# Altium PCB Wenzel_REF.PCBDOC (part 7 of 7)
Units mm, origin at the board's own origin, x right, y up, seen from the top; angles counter-clockwise.
Board outline 222.63 x 100.1 mm, 4 copper layers (Top, L2, L3, Bot), stack 1.6 mm thick; 406 components, 236 nets, 1324 pads, 1362 vias.
Unrouted connection lines stored in the file: 1.
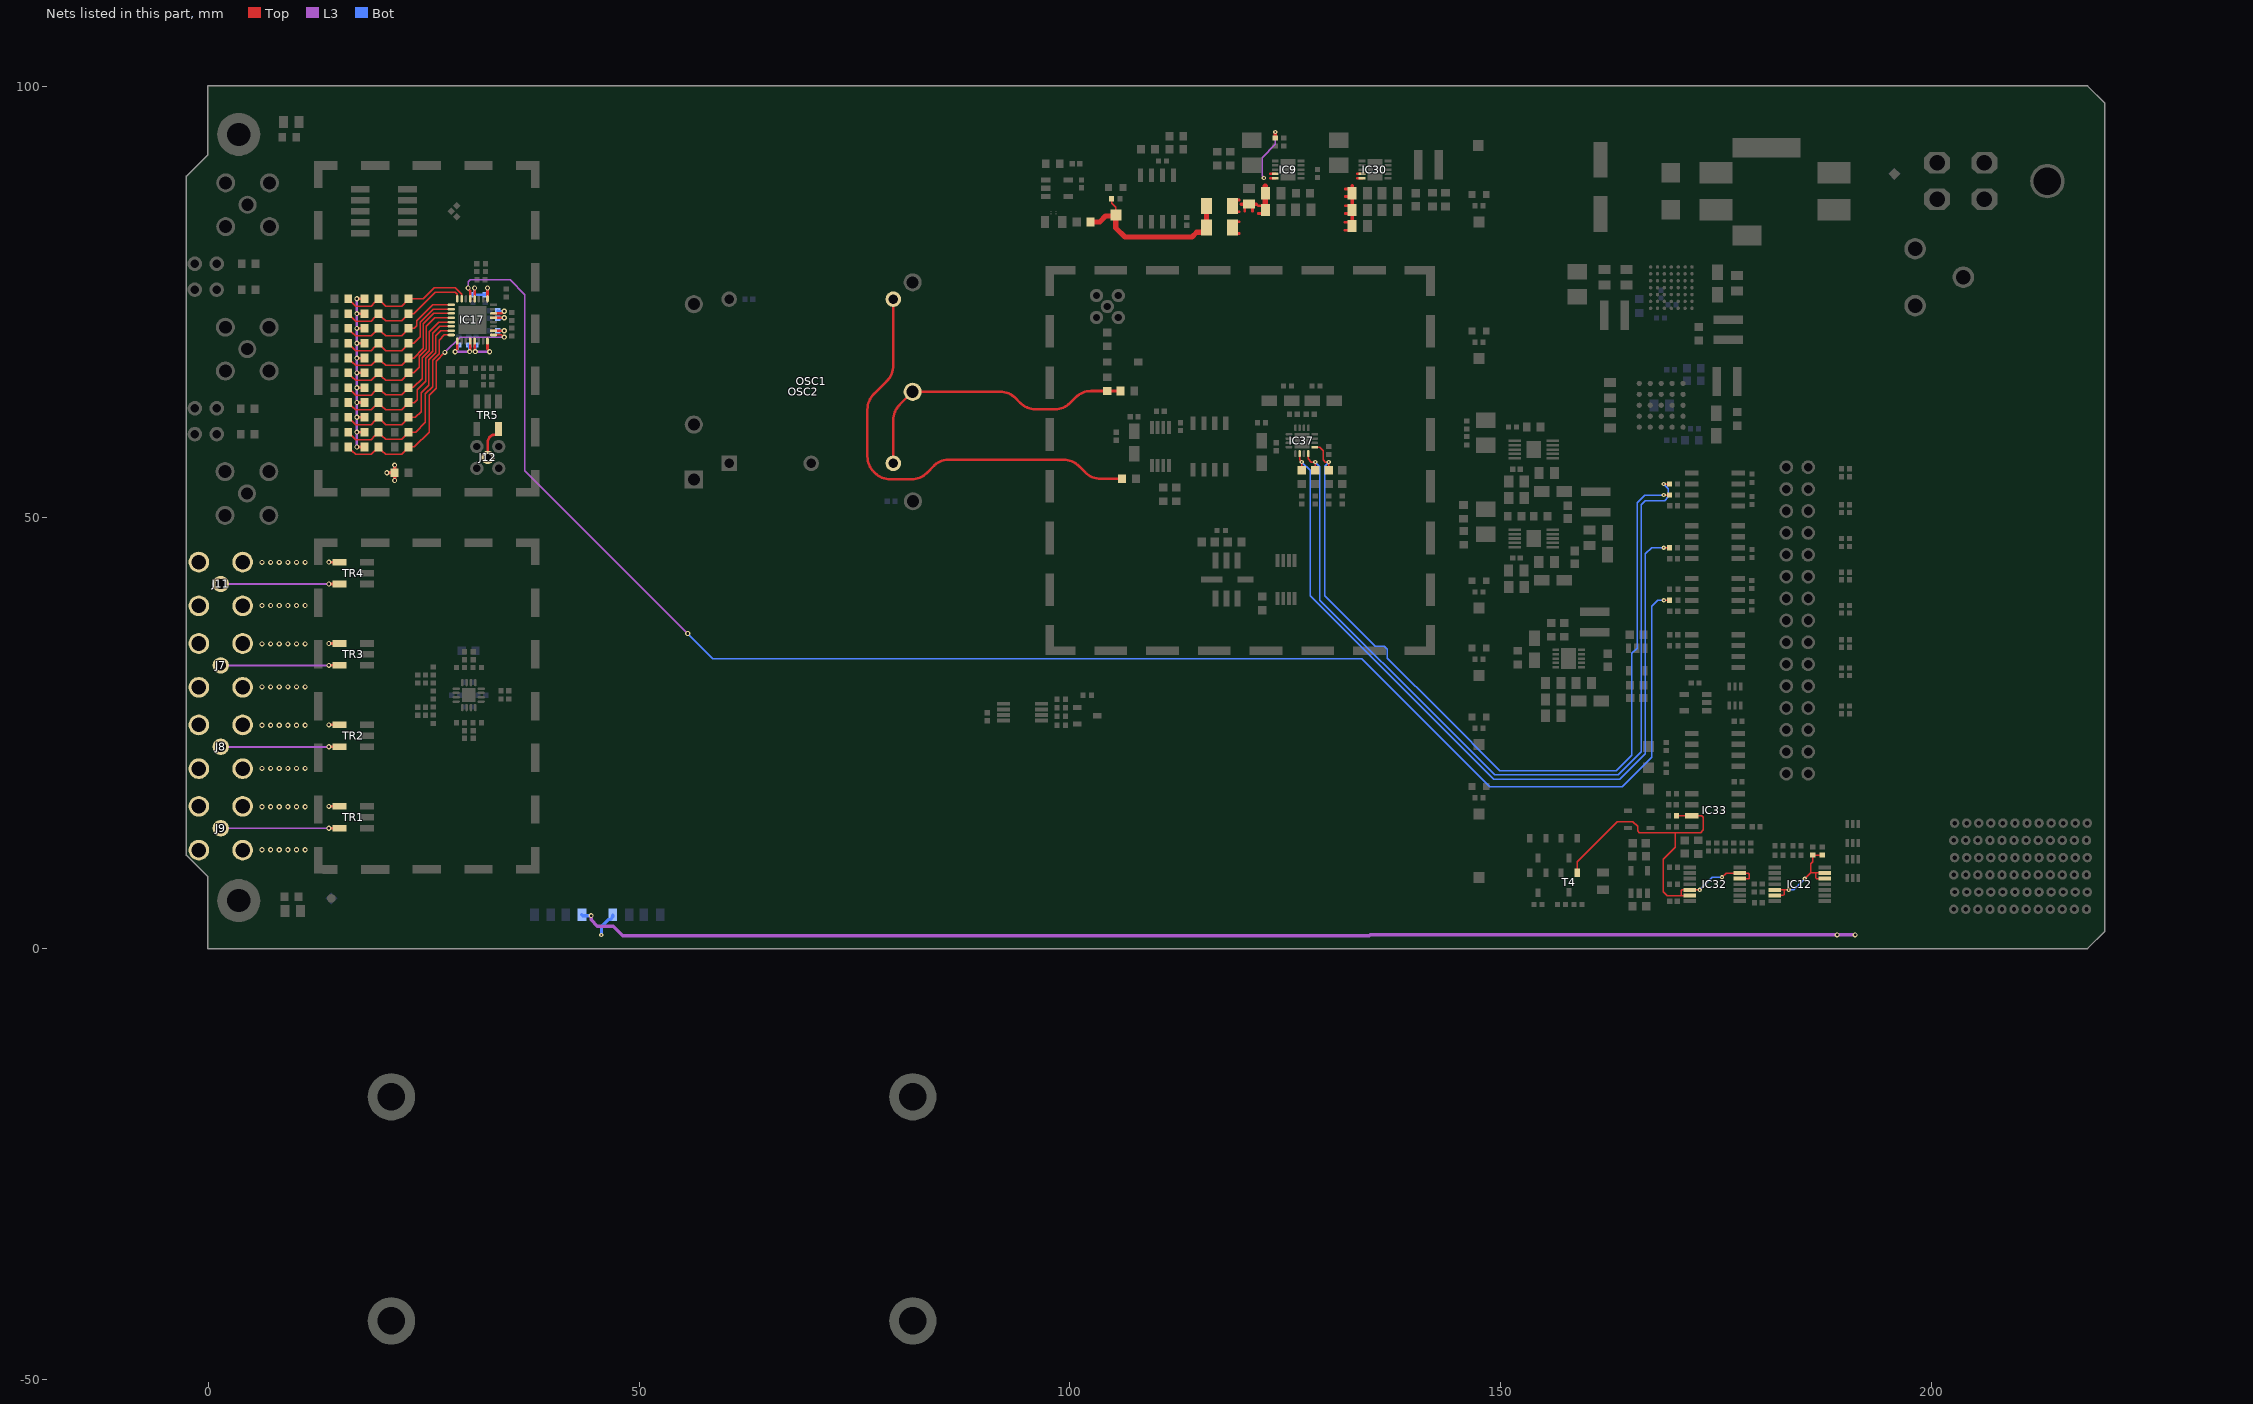
[diagram p7: the nets of this part, all layers, seen from the top]

## Via types
v1: diameter 0.5, hole 0.2, Top to Bot, tented both sides, 654 vias
v2: diameter 0.6, hole 0.3, Top to Bot, 478 vias
v3: diameter 0.5, hole 0.2, Top to Bot, 196 vias
v4: diameter 0.45, hole 0.2, Top to Bot, 34 vias

## Nets (pads, with @x,y where several pads share a name; then routed paths per layer and width w, separated by ;. In a path a pad name is that pad's centre, name@x,y a point inside that pad or via, vN(x,y) a via of type N, cw(c..) or ccw(c..) an arc to the next point about the centre after c; other vN are vias at no path point) (continued)
RF_DIV5_OUT: J12.1 TR5.4 | length 4
  Top w0.3: J12.1@32.451,56.934 32.451,58.73 cw(c33.297,58.73) 33.297,59.576 ccw(c33.297,59.971) 33.693,59.971 TR5.4@33.693,60.238
RF_DIV_OUT0: J9.1 TR1.4 | length 13.4
  Top w0.3: v2(14.007,13.91) TR1.4@14.9,13.91
  L3 w0.226: J9.1@1.465,13.91 v2(14.007,13.91)
RF_DIV_OUT1: J8.1 TR2.4 | length 13.4
  Top w0.3: v2(14.007,23.357) TR2.4@14.9,23.357
  L3 w0.226: J8.1@1.465,23.357 v2(14.007,23.357)
RF_DIV_OUT2: J7.1 TR3.4 | length 13.4
  Top w0.3: v2(14.007,32.803) TR3.4@14.9,32.803
  L3 w0.226: J7.1@1.465,32.803 v2(14.007,32.803)
RF_DIV_OUT3: J11.1 TR4.4 | length 13.4
  Top w0.3: v2(14.007,42.25) TR4.4@14.9,42.25
  L3 w0.226: J11.1@1.465,42.25 v2(14.007,42.25)
RF_GND_OUT0: J9.2 TR1.6 | length 0.9
  Top w0.3: v2(14.007,16.45) TR1.6@14.9,16.45
  other v2: 6.25,11.41 7.25,11.41 8.25,11.41 9.25,11.41 10.25,11.41 11.25,11.41 6.25,16.41 7.25,16.41 8.25,16.41 9.25,16.41 10.25,16.41 11.25,16.41
RF_GND_OUT1: J8.2 TR2.6 | length 0.9
  Top w0.3: v2(14.007,25.897) TR2.6@14.9,25.897
  other v2: 6.25,20.857 7.25,20.857 8.25,20.857 9.25,20.857 10.25,20.857 11.25,20.857 6.25,25.857 7.25,25.857 8.25,25.857 9.25,25.857 10.25,25.857 11.25,25.857
RF_GND_OUT2: J7.2 TR3.6 | length 0.9
  Top w0.3: v2(14.007,35.343) TR3.6@14.9,35.343
  other v2: 6.25,30.303 7.25,30.303 8.25,30.303 9.25,30.303 10.25,30.303 11.25,30.303 6.25,35.303 7.25,35.303 8.25,35.303 9.25,35.303 10.25,35.303 11.25,35.303
RF_GND_OUT3: J11.2 TR4.6 | length 0.9
  Top w0.3: v2(14.007,44.79) TR4.6@14.9,44.79
  other v2: 6.25,39.75 7.25,39.75 8.25,39.75 9.25,39.75 10.25,39.75 11.25,39.75 6.25,44.75 7.25,44.75 8.25,44.75 9.25,44.75 10.25,44.75 11.25,44.75
RST: IC32.5 IC32.6 IC32.12 IC32.13 IC33.3 R147.2 T4.1 | length 45.1
  Top w0.152: T4.1@158.86,8.764 158.86,10.026 163.507,14.673 165.32,14.673 165.849,14.144 165.849,13.614 166.073,13.39 170.24,13.39 ; R147.2@170.356,15.345 R147.2@170.376,15.365 IC33.3@172.132,15.365 173.299,15.365 173.496,15.169 173.496,13.721 173.165,13.39 170.24,13.39 ; IC32.13@171.932,6.095 170.932,6.095 ; v3(173.062,6.755) IC32.12@171.932,6.755 171.021,6.755 170.932,6.666 170.932,6.095 ; v3@175.645,8.223 v3(175.648,8.226) 176.117,8.695 178.707,8.695 178.822,8.58 178.822,8.134 178.733,8.045 IC32.5@177.732,8.045 ; 170.24,13.39 170.24,11.719 168.828,10.307 168.828,6.556 169.288,6.095 170.932,6.095
  Bot w0.152: v3(173.062,6.755) 174.533,8.226 v3(175.648,8.226)
SEL0: IC17.25 R83.1 R84.1 R85.1 | length 30.5
  Top w0.15: R83.1@16.272,58.132 16.272,58.097 16.647,57.722 16.682,57.722 17.118,57.285 18.914,57.285 19.35,57.722 19.382,57.722 R85.1@19.757,58.097 ; R85.1@19.757,58.147 R85.1@19.757,58.097 ; R84.1@23.242,58.097 22.446,57.301 20.588,57.301 20.167,57.722 20.132,57.722 R85.1@19.757,58.097 ; R84.1@23.242,58.147 23.934,58.147 25.634,59.847 25.634,64.133 26.466,64.964 26.466,68.109 v2(27.47,69.113) ; IC17.25@33.112,71.14 34.035,71.14 34.285,70.89 v2(34.361,70.89)
  L3 w0.15: v2(27.47,69.113) 29.246,70.89 v2(34.361,70.89)
SEL1: IC17.16 R86.1 R87.1 R88.1 | length 22.7
  Top w0.15: R86.1@16.272,59.851 16.272,59.816 16.647,59.441 16.682,59.441 17.118,59.005 18.914,59.005 19.35,59.441 19.382,59.441 R88.1@19.757,59.816 ; R88.1@19.757,59.866 R88.1@19.757,59.816 ; R87.1@23.242,59.816 22.446,59.02 20.588,59.02 20.167,59.441 20.132,59.441 R88.1@19.757,59.816 ; R87.1@23.242,59.866 24.084,59.866 25.22,61.002 25.22,64.306 26.052,65.137 26.052,68.222 26.811,68.982 26.811,70.531 27.42,71.14 IC17.16@28.212,71.14
SEL2: IC17.15 R89.1 R90.1 R91.1 | length 21.7
  Top w0.15: R89.1@16.272,61.571 16.272,61.536 16.647,61.161 16.682,61.161 17.118,60.725 18.914,60.725 19.35,61.161 19.382,61.161 R91.1@19.757,61.536 ; R91.1@19.757,61.586 R91.1@19.757,61.536 ; R90.1@23.242,61.536 22.446,60.74 20.588,60.74 20.167,61.161 20.132,61.161 R91.1@19.757,61.536 ; R90.1@23.242,61.586 24.052,61.586 24.701,62.235 24.701,64.413 25.609,65.321 25.609,68.276 26.414,69.081 26.414,71.04 27.013,71.64 IC17.15@28.212,71.64
SEL3: IC17.14 R93.1 R94.1 R95.1 | length 20.4
  Top w0.15: R93.1@16.272,63.29 16.272,63.255 16.647,62.88 16.682,62.88 17.118,62.444 18.914,62.444 19.35,62.88 19.382,62.88 R95.1@19.757,63.255 ; R95.1@19.757,63.305 R95.1@19.757,63.255 ; R94.1@23.242,63.255 22.446,62.459 20.588,62.459 20.167,62.88 20.132,62.88 R95.1@19.757,63.255 ; R94.1@23.242,63.305 23.901,63.305 24.241,63.645 24.241,64.807 25.231,65.797 25.231,68.414 26.068,69.251 26.068,71.321 26.887,72.14 IC17.14@28.212,72.14
SEL4: IC17.13 R96.1 R97.1 R98.1 | length 19.2
  Top w0.15: R96.1@16.272,65.01 16.272,64.975 16.647,64.6 16.682,64.6 17.118,64.164 18.914,64.164 19.35,64.6 19.382,64.6 R98.1@19.757,64.975 ; R98.1@19.757,65.025 R98.1@19.757,64.975 ; R97.1@23.242,64.975 22.446,64.179 20.588,64.179 20.167,64.6 20.132,64.6 R98.1@19.757,64.975 ; R97.1@23.242,65.025 23.273,65.057 23.829,65.057 24.862,66.09 24.862,68.513 25.674,69.325 25.674,71.538 26.776,72.64 IC17.13@28.212,72.64
SEL5: IC17.12 R101.1 R102.1 R103.1 | length 18.3
  Top w0.15: R101.1@16.272,66.729 16.272,66.694 16.647,66.319 16.682,66.319 17.118,65.883 18.914,65.883 19.35,66.319 19.382,66.319 R103.1@19.757,66.694 ; R103.1@19.757,66.744 R103.1@19.757,66.694 ; R102.1@23.242,66.694 22.446,65.898 20.588,65.898 20.167,66.319 20.132,66.319 R103.1@19.757,66.694 ; R102.1@23.242,66.744 23.83,66.744 24.498,67.412 24.498,68.679 25.321,69.502 25.321,72.171 26.29,73.14 IC17.12@28.212,73.14
SEL6: IC17.11 R104.1 R105.1 R106.1 | length 17.1
  Top w0.15: R104.1@16.272,68.449 16.272,68.414 16.647,68.039 16.682,68.039 17.118,67.603 18.914,67.603 19.35,68.039 19.382,68.039 R106.1@19.757,68.414 ; R106.1@19.757,68.464 R106.1@19.757,68.414 ; R105.1@23.242,68.414 22.446,67.618 20.588,67.618 20.167,68.039 20.132,68.039 R106.1@19.757,68.414 ; R105.1@23.242,68.464 23.83,68.464 24.976,69.61 24.976,72.418 26.197,73.64 IC17.11@28.212,73.64
SEL7: IC17.10 R107.1 R108.1 R109.1 | length 16
  Top w0.15: R107.1@16.272,70.168 16.272,70.133 16.647,69.758 16.682,69.758 17.118,69.322 18.914,69.322 19.35,69.758 19.382,69.758 R109.1@19.757,70.133 ; R109.1@19.757,70.183 R109.1@19.757,70.133 ; R108.1@23.242,70.133 22.446,69.337 20.588,69.337 20.167,69.758 20.132,69.758 R109.1@19.757,70.133 ; R108.1@23.242,70.183 23.862,70.183 24.587,70.909 24.587,72.596 26.13,74.14 IC17.10@28.212,74.14
SEL8: IC17.9 R110.1 R111.1 R112.1 | length 14.8
  Top w0.15: R110.1@16.272,71.888 16.272,71.853 16.647,71.478 16.682,71.478 17.118,71.042 18.914,71.042 19.35,71.478 19.382,71.478 R112.1@19.757,71.853 ; R112.1@19.757,71.903 R112.1@19.757,71.853 ; R111.1@23.242,71.853 22.446,71.057 20.588,71.057 20.167,71.478 20.132,71.478 R112.1@19.757,71.853 ; R111.1@23.242,71.903 23.942,71.903 24.222,72.183 24.222,72.771 26.091,74.64 IC17.9@28.212,74.64
SEL9: IC17.8 R114.1 R115.1 R120.1 | length 15.7
  Top w0.15: R114.1@16.272,73.607 16.272,73.572 16.647,73.197 16.682,73.197 17.118,72.761 18.914,72.761 19.35,73.197 19.382,73.197 R120.1@19.757,73.572 ; R120.1@19.757,73.622 R120.1@19.757,73.572 ; R115.1@23.242,73.572 22.446,72.776 20.588,72.776 20.167,73.197 20.132,73.197 R120.1@19.757,73.572 ; R115.1@23.242,73.622 23.857,73.622 24.157,73.923 26.353,76.119 28.659,76.119 28.912,75.866 IC17.8@28.912,75.34
SEL10: IC17.7 R132.1 R133.1 R134.1 | length 15.9
  Top w0.15: R132.1@16.272,75.327 16.272,75.292 16.647,74.917 16.682,74.917 17.118,74.481 18.914,74.481 19.35,74.917 19.382,74.917 R134.1@19.757,75.292 ; R134.1@19.757,75.342 R134.1@19.757,75.292 ; R133.1@23.242,75.292 22.446,74.496 20.588,74.496 20.167,74.917 20.132,74.917 R134.1@19.757,75.292 ; R133.1@23.242,75.342 24.959,75.342 26.21,76.593 28.698,76.593 29.412,75.878 IC17.7@29.412,75.34
SERVMOD: IC12.5 IC12.6 IC12.12 IC12.13 R50.2 R54.1 | length 13.2
  Top w0.152: IC12.13@181.799,6.105 182.76,6.105 182.849,6.194 182.849,6.755 ; IC12.12@181.799,6.755 182.849,6.755 ; v3(183.4,6.755) 182.849,6.755 ; v3(185.253,8.055) 185.922,8.724 ; R54.1@187.274,10.779 R50.2@186.18,10.779 186.18,10.017 185.922,9.76 185.922,8.724 ; IC12.5@187.599,8.055 186.598,8.055 186.509,8.144 186.509,8.724 ; IC12.6@187.599,8.705 187.58,8.724 186.509,8.724 ; 185.922,8.724 186.509,8.724
  Bot w0.152: v3(183.4,6.755) 183.953,6.755 v3(185.253,8.055)
SPI_MOSI: C68.1 IC37.9 R161.1 | length 98.7
  Top w0.15: IC37.9@128.396,58.121 128.976,58.121 129.375,57.722 129.375,56.67 129.645,56.401 130.014,56.401 v1(130.015,56.399) ; v1@129.905,56.29 130.015,56.18 C68.1@130.015,55.446 ; v1@168.805,52.571 v1(168.899,52.571) R161.1@169.509,52.571
  Bot w0.15: v1(130.015,56.399) 129.543,55.927 129.543,40.909 135.408,35.044 136.454,35.044 136.802,34.695 136.802,33.65 143.4,27.052 ; 143.4,27.052 149.854,20.599 163.402,20.599 165.198,22.395 165.198,34.2 165.797,34.799 165.797,51.695 166.674,52.571 v1(168.899,52.571)
SPI_NSS: C35.1 IC37.6 R13.1 | length 93.2
  Top w0.15: IC37.6@126.646,57.371 126.646,56.65 v1(126.897,56.399) C35.1@126.897,55.446 ; v1@168.805,46.458 v1(168.899,46.458) R13.1@169.509,46.458
  Bot w0.15: v1(126.897,56.399) 127.866,55.43 127.866,40.877 143.4,25.343 149.139,19.604 163.814,19.604 166.77,22.56 166.77,45.757 167.471,46.458 v1(168.899,46.458)
SPI_SCK: C66.1 IC37.8 R10.1 | length 100.1
  Top w0.15: IC37.8@127.646,57.371 127.646,56.752 128.006,56.393 128.353,56.393 128.456,56.29 C66.1@128.456,55.446 ; v1@168.805,53.841 v1(168.899,53.841) R10.1@169.509,53.841
  Bot w0.15: v1(128.456,56.399) 128.999,55.857 128.999,40.382 143.4,25.98 149.268,20.112 163.591,20.112 166.27,22.792 166.27,51.43 166.753,51.913 168.99,51.913 169.423,52.346 169.423,53.318 v1(168.899,53.841)
STRIP1: R156.1 | length 149.1
  Top w0.4: v2@44.408,3.75 v2(44.432,3.774)
  L3 w0.4: v2(44.432,3.774) 44.432,3.285 45.167,2.55 47,2.55 48.127,1.423 134.739,1.423 134.85,1.534 188.964,1.534 189.005,1.575 189.046,1.534 191.059,1.534 v2@191.1,1.575
  Bot w0.4: R156.1@43.375,3.85 43.451,3.774 v2(44.432,3.774)
  other v2: 189.005,1.534 191.1,1.534
STRIP2: R154.1 | length 3
  Bot w0.381: v3(45.625,1.525) 45.648,1.548 45.648,2.543 46.421,3.316 46.649,3.316 46.955,3.621 R154.1@46.955,3.85
SYNCn: IC17.5 R15.1 | length 197.2
  Top w0.15: v1@168.815,40.348 v1(168.909,40.348) R15.1@169.519,40.348
  Top w0.3: v2(30.162,76.588) 30.162,76.512 30.412,76.262 IC17.5@30.412,75.34
  L3 w0.15: v2(30.162,76.588) 30.162,77.3 30.418,77.556 35.029,77.556 36.75,75.834 36.75,55.39 v2(55.64,36.5)
  Bot w0.15: v2(55.64,36.5) 58.564,33.576 133.849,33.576 143.4,24.025 148.681,18.744 164.101,18.744 167.517,22.16 167.517,39.649 168.216,40.348 v1(168.909,40.348)
VCC_OSC: L11.1 R6.2 R24.2 R28.2 TP9.1 | length 20.5
  Top w0.2: R6.2@104.845,86.958 104.845,86.428 105.315,85.958 TP9.1@105.315,85.084
  Top w0.6: L11.1@102.375,84.255 103.443,84.255 104.131,84.943 105.174,84.943 TP9.1@105.315,85.084 105.315,83.545 106.366,82.494 114.144,82.494 114.714,83.064 115.527,83.064 115.852,83.389 R28.2@115.852,83.614 R24.2@115.852,85.674
VCC_OSC1: C4.2 C5.2 C6.2 IC9.9 IC9.10 R24.1 R48.2 | length 13.6
  Top w0.3: R24.1@119.242,85.424 119.653,85.424 ; R24.1@119.242,86.801 119.653,86.801 ; 120.299,85.514 C6.2@120.299,85.926 ; 121.176,85.514 C6.2@121.176,85.926 ; 121.862,85.239 122.274,85.239 122.649,85.614 122.649,85.766 C5.2@122.274,86.141 ; 121.862,86.116 C5.2@122.274,86.116 ; 123.248,89.327 IC9.10@123.81,89.327 ; 123.248,89.827 IC9.9@123.81,89.827
  Top w0.4: 119.888,86.315 C6.2@120.299,86.315 ; C6.2@121.201,86.315 121.612,86.315 ; R48.2@123.823,93.993 v1@123.823,94.675
  Top w0.6: C5.2@122.664,86.116 122.664,86.528 ; 122.664,86.719 C4.2@122.664,87.13 ; C4.2@122.664,88.032 122.664,88.443
  L3 w0.15: v1(122.498,89.363) 122.498,89.409 122.281,89.626 122.281,91.716 123.823,93.258 v1(123.823,94.683)
VCC_OSC2: C117.2 C121.2 C122.2 IC30.9 IC30.10 R28.1 | length 8.7
  Top w0.3: R28.1@119.241,82.913 119.653,82.913 ; R28.1@119.241,84.29 119.653,84.29 ; 131.892,83.289 C121.2@132.79,83.289 ; 131.892,84.209 C121.2@132.79,84.209 ; 131.933,85.239 132.345,85.239 132.72,85.614 132.72,85.766 C122.2@132.345,86.141 ; 131.933,86.116 C122.2@132.345,86.116 ; 131.948,87.206 C117.2@132.36,87.206 ; 131.948,88.083 C117.2@132.36,88.083 ; 133.319,89.327 IC30.10@133.881,89.327 ; 133.319,89.827 IC30.9@133.881,89.827
  Top w0.4: C121.2@132.735,84.264 132.735,84.676 ; 132.735,84.701 C122.2@132.735,85.113 ; C122.2@132.735,86.116 132.735,86.528 ; 132.735,86.719 C117.2@132.735,87.13 ; C117.2@132.735,88.032 132.735,88.443
VCO_IN: OSC1.3 OSC2.3 R2.2 R168.1 | length 34.5
  Top w0.3: OSC1.3@79.5,56.25 79.5,61.248 cw(c82.04,61.248) 80.244,63.044 OSC2.3@81.75,64.55 91.898,64.55 cw(c91.898,62.01) 93.694,63.806 94.223,63.277 ccw(c96.019,65.073) 96.019,62.533 98.269,62.533 ccw(c98.269,64.981) 100,63.25 100.647,63.897 cw(c102.443,62.101) 102.443,64.641 R168.1@104.34,64.641 R2.2@105.865,64.641
VCO_REF_IN: OSC1.4 R148.2 | length 51.8
  Top w0.3: OSC1.4@79.5,75.3 79.5,67.602 cw(c76.96,67.602) 78.756,65.806 77.244,64.294 ccw(c79.04,62.498) 76.5,62.498 76.5,57.052 ccw(c79.04,57.052) 77.244,55.256 77.366,55.134 ccw(c79.162,56.93) 79.162,54.39 81.592,54.39 ccw(c81.592,56.93) 83.388,55.134 84.25,55.996 cw(c85.887,54.358) 85.887,56.674 99.241,56.674 cw(c99.241,54.134) 101.037,55.93 101.774,55.193 ccw(c103.57,56.989) 103.57,54.449 R148.2@106.05,54.449
Vs: C44.2 C54.2 C55.2 C56.2 C57.2 C58.2 C59.2 C61.2 IC17.1 IC17.4 IC17.17 IC17.20 IC17.21 IC17.24 IC17.26 IC17.29 IC17.30 L13.2 R85.2 R88.2 R91.2 R95.2 R98.2 R103.2 R106.2 R109.2 R112.2 R120.2 R134.2 | length 52.8
  Top w0.3: v2(17.264,58.147) R85.2@18.157,58.147 ; v2(17.264,59.866) R88.2@18.157,59.866 ; v2(17.264,61.586) R91.2@18.157,61.586 ; v2(17.264,63.305) R95.2@18.157,63.305 ; v2(17.264,65.025) R98.2@18.157,65.025 ; v2(17.264,66.744) R103.2@18.157,66.744 ; v2(17.264,68.464) R106.2@18.157,68.464 ; v2(17.264,70.183) R109.2@18.157,70.183 ; v2(17.264,71.903) R112.2@18.157,71.903 ; v2(17.264,73.622) R120.2@18.157,73.622 ; v2(17.264,75.342) R134.2@18.157,75.342 ; v2(28.662,69.191) 28.662,69.267 28.912,69.517 IC17.17@28.912,70.44 ; v2@30.337,69.193 v2(30.337,69.21) 30.337,69.274 30.412,69.349 IC17.20@30.412,70.44 ; IC17.21@30.912,70.44 30.912,69.349 30.987,69.274 v2(30.987,69.21) v2@30.987,69.193 ; IC17.4@30.912,75.34 v2(30.912,76.588) ; IC17.24@32.412,70.44 32.412,69.517 32.662,69.267 v2(32.662,69.191) ; IC17.1@32.412,75.34 v2(32.412,76.588) ; IC17.26@33.112,71.64 33.387,71.64 v2(34.361,71.639) ; IC17.29@33.112,73.14 v2(34.361,73.14) ; IC17.30@33.112,73.64 34.035,73.64 34.285,73.89 v2(34.361,73.89)
  Top w0.4: v2(20.74,55.146) L13.2@21.633,55.146 ; v2(21.633,54.253) L13.2@21.633,55.146 ; v2(21.633,56.039) L13.2@21.633,55.146
  L3 w0.3: v2(17.264,58.147) v2(17.264,59.866) v2(17.264,61.586) v2(17.264,63.305) v2(17.264,65.025) v2(17.264,66.744) v2(17.264,68.464) v2(17.264,70.183) v2(17.264,71.903) v2(17.264,73.622) v2(17.264,75.342) ; v2(28.662,69.191) 30.318,69.191 v2(30.337,69.21) ; v2(30.987,69.21) 31.006,69.191 v2(32.662,69.191)
  Bot w0.3: v2(28.662,69.191) 28.662,69.249 28.93,69.517 28.93,69.821 C55.2@29.09,69.981 ; C44.2@30.229,69.981 30.312,69.898 30.312,69.234 v2(30.337,69.21) ; v2(30.912,76.588) 30.892,76.568 30.892,76.147 30.884,76.14 30.884,75.972 C58.2@30.724,75.812 C59.2@32.15,75.812 32.392,76.054 32.392,76.568 v2(32.412,76.588) ; v2(30.987,69.21) 31.012,69.234 31.012,69.917 C61.2@31.077,69.981 ; C54.2@33.592,71.639 v2(34.361,71.639) ; C56.2@33.592,73.074 33.63,73.112 34.333,73.112 v2(34.361,73.14) ; C57.2@33.592,73.933 33.614,73.911 34.339,73.911 v2(34.361,73.89)
pads on no net: CON1.9 D2.1 D2.6 D3.5 D3.6 D6.6 Designator192.MEC1 Designator192.MEC2 Designator192.MEC3 Designator192.MEC4 FTG5.FTG2 FTG6.1 FTG7.1 FTG8.1 IC2.4 IC4.6 IC6.5 IC7.5 IC7.6 IC8.4 IC10.7 IC15.4 IC18.5 IC18.6 IC18.7 IC36.A5 IC36.C3 IC36.C4 IC36.E5 IC37.7 IC37.13 IC37.16 J6.A5 J6.B1 J6.B5 J6.B6 J6.C6 J6.D5 J6.E2 J6.E5 J6.F2 J6.G3 J6.H2 J6.H3 J6.H6 J6.I2 J6.I6 J6.J3 J6.K3 J6.K6 J6.L2 J6.L6 J10.2 U1.C6 U1.C7 U1.D6 U1.E6 U1.G7

## Polygon pours and split planes (outlines as drawn)
NetC19_2 on Bot "NETC19_2_L04_P142" (solid, remove dead copper, pour order 142): 165.811,59.598 166.193,59.216 167.962,59.216 168.376,59.63 168.376,66.336 167.962,66.75 166.193,66.75 165.811,66.368 165.811,60.298
no net on Bot "Balancing_Bot" (solid, pour order 186): -2.539,10.815 cw(c-2.489,10.82) -2.54,10.82 -2.54,15.138 cw(c-2.489,15.138) -2.539,15.142 cw(c-2.489,15.145) -2.54,15.145 -2.54,22.645 -2.54,89.511 cw(c-2.489,89.511) -2.525,89.547 -0.05,92.021 -0.05,100 cw(c0,100) 0,100.05 159.99,100.05 cw(c159.995,100.001) 159.995,100.05 218.037,100.05 cw(c218.039,100) 218.075,100.036 220.074,98.036 cw(c220.039,98) 220.089,98 220.089,2 cw(c220.039,2) 220.074,1.964 218.075,-0.035 cw(c218.039,0) 218.039,-0.05 0,-0.05 cw(c0,0) -0.05,0 -0.05,8.299 -2.525,10.773 cw(c-2.489,10.809)
GND on Bot "GND_L04_P171" (solid, remove dead copper, pour order 171): 6.325,92.075 -0.037,92.075 -2.52,89.592 -2.52,82.414 -2.72,82.214 2.036,82.214 3.25,81 6,81 6.636,80.364 6.636,75.653 5.233,74.25 1.25,74.25 0.25,73.25 0.25,65.636 1.886,64 6.133,64 6.72,63.412 6.72,59.699 5.521,58.5 2.097,58.5 1.604,58.007 -2.503,58.007 -2.513,58.017 -2.513,46.535 15.519,46.535 cw(c15.519,45.579) 16.475,45.579 16.475,10.603 cw(c15.5,10.603) 15.5,9.628 -1.181,9.628 -1.245,9.564 -0.258,8.578 4.935,8.578 6.35,7.163 6.35,3.251 6.888,2.713 6.921,2.746 220.074,2.746 220.074,97.053 6.805,97.053 6.325,96.573
RF_GND_OUT0 on Bot "RF_GND_OUT0_L04_P167" (solid, remove dead copper, pour order 167): -2.489,18.156 15.655,18.156 cw(c15.655,17.315) 16.25,17.91 cw(c15.707,17.367) 16.475,17.367 16.475,10.505 cw(c15.63,10.505) 15.63,9.66 -2.488,9.66
P3V3A on Bot "P3V3A_L04_P107" (solid, remove dead copper, pour order 107): 30.577,33.697 30.577,35.346 30.981,35.75 34.354,35.75 34.778,35.326 34.778,33.619 34.435,33.276 30.998,33.276
RF_GND_OUT1 on Bot "RF_GND_OUT1_L04_P168" (solid, remove dead copper, pour order 168): -2.489,27.603 15.655,27.603 cw(c15.655,26.762) 16.25,27.357 cw(c15.707,26.814) 16.475,26.813 16.475,19.952 cw(c15.63,19.952) 15.63,19.107 -2.488,19.107
RF_GND_OUT2 on Bot "RF_GND_OUT2_L04_P169" (solid, remove dead copper, pour order 169): -2.489,37.05 15.655,37.05 cw(c15.655,36.209) 16.25,36.803 cw(c15.707,36.26) 16.475,36.26 16.475,29.398 cw(c15.63,29.398) 15.63,28.553 -2.488,28.553
RF_GND_OUT3 on Bot "RF_GND_OUT3_L04_P170" (solid, remove dead copper, pour order 170): -2.489,46.496 15.655,46.496 cw(c15.655,45.655) 16.25,46.25 cw(c15.707,45.707) 16.475,45.707 16.475,38.845 cw(c15.63,38.845) 15.63,38 -2.488,38
P3V3A on Bot "P3V3A_L04_P166" (solid, remove dead copper, pour order 166): 101.758,89.164 101.758,89.001 102.625,88.135 113.121,88.135 113.903,87.353 113.903,83.744 114.034,83.613 114.288,83.613 114.428,83.753 114.428,87.36 115.139,88.071 137.046,88.071 151.059,74.058 151.059,32.125 153.703,29.481 154.308,29.481 154.54,29.714 154.54,36.707 156.102,38.268 156.102,38.543 152.477,42.168 152.477,74.853 138.227,89.103 117.144,89.103 115.007,91.24 115.007,94.62 114.869,94.758 114.095,94.758 113.653,94.316 113.653,91.579 111.519,89.446 101.974,89.446 101.758,89.23
P3V6 on Bot "P3V6_L04_P157" (solid, remove dead copper, pour order 157): 161.392,59.19 161.392,57.021 164.572,53.841 166.974,53.841 167.198,54.066 167.198,55.917 163.361,59.755 161.957,59.755
P12V0 on Bot "P12V0_L04_P155" (solid, remove dead copper, pour order 155): 160.55,11.001 163.191,11.001 163.799,10.392 163.799,10.077 164.087,9.789 167.905,9.789 168.192,10.076 168.192,12.464 172.462,16.734 176.028,16.734 176.54,17.245 176.54,20.259 181.102,20.259 181.717,20.875 184.148,20.875 184.569,20.454 184.569,19.734 185.085,19.218 186.185,19.218 186.836,19.87 186.836,21.354 186.051,22.139 184.49,22.139 184.16,22.469 184.16,23.824 184.811,24.475 186.198,24.475 186.676,24.953 186.676,56.856 179.534,63.997 179.534,78.138 185.235,83.839 189.75,79.323 189.75,18.19 185.655,14.095 175.951,14.095 168.807,6.952 162.013,6.952 159.922,9.043 159.922,10.372
P3V3_CPCIS on Bot "P3V3_CPCIS_L04_P151" (solid, remove dead copper, pour order 151): 176.189,17.334 176.189,18.136 175.826,18.5 172.09,18.5 166.78,13.191 151.523,13.191 150.988,12.656 150.988,12.408 151.149,12.247 163.231,12.247 164.06,11.418 164.06,10.253 164.23,10.083 164.797,10.083 167.559,12.846 168.227,12.846 172.312,16.931 175.845,16.931 176.189,17.275
P3V3_MP on Bot "P3V3_MP_L04_P147" (solid, remove dead copper, pour order 147): 166.509,13.671 166.42,13.671 166.263,13.829 166.263,16.033 172.153,21.923 185.933,21.923 186.562,21.294 186.562,19.904 186.079,19.422 185.216,19.422 184.734,19.904 184.734,20.724 184.368,21.089 181.567,21.089 180.977,20.5 173.786,20.5 166.958,13.671 166.526,13.671
P12V0 on Bot "P12V0_L04_P146" (solid, remove dead copper, pour order 146): 160.591,88.024 159.449,88.024 158.617,87.193 158.617,83.168 159.52,82.265 175.281,82.265 179.534,78.011 184.01,78.011 185.235,79.236 185.235,83.839 181.046,88.027 166.301,88.027
STRIP1 on Bot "STRIP1_L04_P109" (solid, pour order 109): 217.519,0.962 217.536,0.962 218.776,2.202 119.986,2.202 119.986,0.962
STRIP2 on Bot "esd1" (solid, pour order 140): 82.919,0.962 99.986,0.962 99.986,2.231 44.986,2.231 44.986,0.962
CHASSIS on Bot "esd1" (solid, pour order 108): 0.236,2.232 39.986,2.232 39.986,1.012 0.236,1.012
NetC72_2 on Top "NETC72_2_L01_P113" (solid, remove dead copper, pour order 113): 163.447,77.373 163.704,77.63 165.863,77.63 165.974,77.74 168.214,77.74 168.376,77.578 168.376,75.48 168.091,75.195 166.499,75.195 166.053,74.749 166.053,71.751 165.585,71.282 163.447,71.282
P13V0 on Top "P13V0_L01_P114" (solid, remove dead copper, pour order 114): 163.11,77.373 162.853,77.63 160.811,77.63 159.986,76.805 157.12,76.805 157.12,75.195 157.12,71.843 157.681,71.282 163.11,71.282
NetC60_1 on Top "NETC60_1_L01_P115" (solid, remove dead copper, pour order 115): 171.16,76.626 171.16,75.6 172.339,74.422 173.115,74.422 173.97,73.566 173.97,72.365 174.271,72.065 178.49,72.065 178.77,72.345 178.77,76.482 178.32,76.932 171.332,76.932 171.16,76.76
P12V0 on Top "P12V0_L01_P116" (solid, remove dead copper, pour order 116): 176.927,61.608 176.67,61.865 176.67,63.16 176.497,63.333 176.497,67.883 179.484,67.883 179.673,67.694 179.673,62.234 179.047,61.608 178.007,61.608
GND on Top "GND_L01_P117" (solid, remove dead copper, pour order 117): 152.708,58.864 152.708,56.554 152.512,56.359 152.067,56.359 151.924,56.216 151.924,51.603 152.258,51.269 155.833,51.269 155.833,53.712 155.188,54.357 155.188,56.337 154.859,56.666 154.859,58.889 154.739,59.008 152.841,58.997
NetC85_1 on Top "NETC85_1_L01_P118" (solid, remove dead copper, pour order 118): 156.039,52.519 156.039,51.307 156.52,50.827 158.524,50.827 158.524,56.661 157.837,57.347 157.27,57.347 157.086,57.531 155.277,57.531 155.283,57.526 155.283,56.641 155.507,56.417 155.507,54.445 156.039,53.912
NetC65_2 on Top "NETC65_2_L01_P119" (solid, remove dead copper, pour order 119): 157.25,50.093 158.817,50.093 158.817,51.296 159.064,51.543 163.366,51.543 163.394,51.515 163.394,47.558 163.11,47.274 161.562,47.274 161.084,47.751 159.433,47.751 159.064,47.382 159.064,45.57 158.078,45.57 158.078,47.854 157.25,48.682
GND on Top "GND_L01_P120" (solid, remove dead copper, pour order 120): 152.708,48.543 152.708,46.234 152.512,46.038 152.067,46.038 151.924,45.895 151.924,41.283 152.258,40.949 155.833,40.949 155.833,43.392 155.188,44.037 155.188,46.016 154.859,46.345 154.859,48.568 154.739,48.688 152.841,48.677
NetC26_1 on Top "NETC26_1_L01_P121" (solid, remove dead copper, pour order 121): 156.039,42.198 156.039,40.987 158.054,40.987 159.081,42.014 159.081,45.097 157.837,45.097 157.837,46.619 157.429,47.027 157.27,47.027 157.086,47.211 155.277,47.211 155.283,47.205 155.283,46.321 155.507,46.097 155.507,44.124 156.039,43.592
P10V5A on Top "P10V5A_L01_P122" (solid, remove dead copper, pour order 122): 151.683,41.583 151.683,45.869 152.33,46.516 152.33,47.13 152.252,47.208 150.126,47.208 149.696,46.778 148.978,46.778 148.978,41.674 149.45,41.201 151.556,41.201 151.683,41.328
NetC2_2 on Top "NETC2_2_L01_P123" (solid, remove dead copper, pour order 123): 158.941,33.826 158.941,32.241 159.147,32.034 159.578,32.034 159.822,31.79 159.822,30.053 160.538,29.337 160.538,27.7 160.722,27.517 162.751,27.517 163.304,28.069 163.304,33.009 163.126,33.186 161.715,33.186 161.626,33.097 161.626,32.177 161.482,32.033 161.481,32.034 161.375,32.034 161.232,32.178 161.232,33.313 160.719,33.826
GND on Top "GND_L01_P124" (solid, remove dead copper, pour order 124): 157.001,34.753 157.001,32.263 156.441,31.703 156.441,26.09 156.52,26.012 159.522,26.012 160.041,26.531 160.041,29.397 159.249,30.189 159.249,31.612 158.732,32.129 158.732,34.466 158.71,34.489
P3V3A on Top "P3V3A_L01_P125" (solid, remove dead copper, pour order 125): 156.754,33.251 155.304,33.251 154.933,32.881 154.933,32.372 154.685,32.123 153.871,32.123 153.14,31.393 153.14,26.575 153.704,26.012 155.809,26.012 155.809,31.475 156.747,32.414 156.747,32.819
VCC_OSC1 on Top "VCC_OSC1_L01_P127" (solid, remove dead copper, pour order 127): 123.784,89.979 122.699,89.979 121.864,89.144 121.864,87.361 121.548,87.045 118.839,87.045 118.4,86.606 118.4,85.239 118.683,84.957 123.246,84.957 123.432,85.143 123.432,88.261 124.206,89.034 124.206,89.97 124.196,89.979
GND on Top "GND_L01_P129" (solid, remove dead copper, pour order 129): 134.508,91.559 134.508,88.923 133.989,88.405 133.989,83.013 135.717,83.013 136.754,84.05 136.754,88.392 136.242,88.905 136.242,91.516 136.216,91.542
VCC_OSC2 on Top "VCC_OSC2_L01_P130" (solid, remove dead copper, pour order 130): 133.855,89.979 132.77,89.979 131.212,88.421 131.212,85.096 130.148,84.033 120.877,84.033 120.404,84.506 118.222,84.506 118.222,82.414 133.195,82.414 133.503,82.722 133.503,88.261 134.277,89.034 134.277,89.97 134.267,89.979
GND on Top "GND_L01_P136" (solid, remove dead copper, pour order 136): 157.12,77.343 159.922,77.343 160.591,78.011 168.066,78.011 168.566,77.511 168.566,75.776 169.249,75.092 170.982,75.092 170.981,75.093 170.981,76.724 171.405,77.148 172.28,77.148 172.543,77.412 178.3,77.412 178.32,77.432 178.32,79.282 177.269,80.332 157.837,80.332 157.12,79.616
P12V0 on Top "P12V0_L01_P141" (solid, remove dead copper, pour order 141): 174.22,71.516 173.877,71.174 172.426,71.174 172.216,70.964 172.226,70.953 172.226,69.251 172.977,68.5 175.88,68.5 176.797,67.583 178.207,67.583 178.207,61.777 178.618,61.367 178.618,59.808 185.137,59.808 185.235,59.71 185.235,79.125 184.027,80.332 180.4,80.332 179.152,79.084 179.152,72.148 178.52,71.516
P12V0 on Top "P12V0_L01_P143" (solid, remove dead copper, pour order 143): 158.844,53.069 158.844,52.331 159.064,52.111 163.393,52.111 163.394,52.11 163.394,54.474 164.626,55.706 178.602,55.706 180.243,57.347 184.088,57.347 185.241,58.501 185.241,60.222 179.001,60.222 176.612,57.833 160.648,57.833 158.837,56.022
P3V3_CPCIS on Top "P3V3_CPCIS_L01_P148" (solid, remove dead copper, pour order 148): 174.184,16.931 175.845,16.931 176.189,17.275 176.189,19.465 176.54,19.817 178.301,19.817 178.533,19.585 178.533,18.834 180.554,16.813 180.554,12.336 179.784,11.566 177.869,11.566 177.68,11.377 177.68,10.593 178.032,10.241 179.645,10.241 181.332,11.928 181.332,18.213 178.941,20.605 170.487,20.605 168.049,18.167 168.049,14.486 168.762,13.773 169.532,13.773 169.736,13.977 169.736,14.385 169.717,14.403 168.994,14.403 168.509,14.888 168.521,14.901 168.521,17.332 168.781,17.592 169.652,17.592 169.724,17.664 169.724,18.461 169.995,18.732 173.777,18.732 174.082,18.428 174.082,17.847 173.892,17.658 173.892,17.222
NetL1_1 on Top "NETL1_1_L01_P149" (solid, remove dead copper, pour order 149): 158.504,35.766 158.817,35.452 160.276,35.452 161.258,34.47 161.258,33.834 161.435,33.657 162.997,33.657 163.304,33.964 163.304,37.306 162.97,37.64 158.837,37.64 158.504,37.306
P3V3 on Top "P3V3_L01_P150" (solid, remove dead copper, pour order 150): 162.816,23.026 162.816,16.245 163.935,15.127 165.41,15.127 165.814,15.53 165.814,16.572 164.23,18.156 164.23,23.646 168.308,27.724 168.308,36.735 168.621,37.048 170.083,37.048 170.305,36.826 170.671,36.826 170.691,36.846 170.691,38.589 170.692,38.591 170.679,38.604 170.303,38.604 170.113,38.414 168.64,38.414 168.308,38.746 168.308,43.124 168.63,43.446 170.502,43.446 170.782,43.726 170.782,44.728 170.178,44.728 170.176,44.726 170.176,44.538 169.992,44.355 168.639,44.355 168.311,44.683 168.311,49.048 168.852,49.59 170.33,49.59 170.795,50.056 170.795,51.01 170.191,51.01 170.184,51.003 170.184,50.638 169.85,50.303 168.004,50.303 166.304,48.604 166.304,38.866 167.305,37.865 167.305,33.827 166.98,33.502 166.365,33.502 166.033,33.17 166.033,28.109 162.816,24.892
NetC19_2 on Top "NETC19_2_L01_P152" (solid, remove dead copper, pour order 152): 174.815,68.133 175.751,68.133 176.144,67.741 176.144,63.187 176.339,62.992 176.339,61.295 176.036,60.992 173.512,60.992 172.78,61.724 172.78,67.937 172.977,68.133
P5V4A on Top "P5V4A_L01_P160" (solid, remove dead copper, pour order 160): 122.705,37.477 130.421,37.473 132.405,37.472 134.5,39.567 134.5,55.218 135.202,55.92 144.491,55.92 148.889,51.522 151.556,51.522 151.683,51.648 151.683,56.189 152.33,56.837 152.33,57.451 152.252,57.528 150.126,57.528 149.696,57.098 135.202,57.098 134.5,57.8 134.5,64.849 132.405,66.944 125.28,66.94 124.488,66.148 124.488,65.221 125.085,65.221 125.085,65.79 125.437,66.123 128.444,66.123 128.737,65.829 128.737,64.914 129.317,64.914 129.318,65.829 129.611,66.123 131.768,66.123 133.48,64.411 133.48,40.005 131.768,38.293 130.421,38.293 130.421,38.295 122.847,38.293 122.616,38.546 122.616,39.196 122.018,39.196 122.018,38.164
no net on Top "Balancing_Top" (solid, pour order 182): 6.178,95.054 220.039,95.054 220.039,2.717 -2.489,2.717 -2.489,89.511 -0.037,92.075 5.849,91.662
P3V3A on Top "NONET_L-01_P-001" (solid, remove dead copper, pour order 172): 154.364,26.043 154.364,32.123 151.061,32.123 150.184,33 50.416,33 45.943,37.472 41.487,37.472 40.75,36.736 40.75,35.271 41.549,34.472 44.667,34.472 48.586,30.553 102.792,30.553 104.984,28.361 152.046,28.361
P10V5A on Top "P10V5A_L01_P177" (solid, remove dead copper, pour order 177): 149.083,46.316 148.062,45.295 140.632,45.295 132.555,37.219 116.275,37.219 106.021,47.472 106.021,52.129 105.551,52.6 105.197,52.6 104.437,51.839 104.437,46.469 115.305,35.601 133.347,35.601 141.466,43.72 148.089,43.72 149.182,42.627
NetC40_2 on Top "NETC40_2_L01_P158" (solid, remove dead copper, pour order 158): 95.138,83.206 95.427,82.917 97.136,82.917 97.512,83.293 97.512,84.847 97.512,85.218 97.136,85.594 95.427,85.594 95.138,85.305 95.138,84.144
P3V6 on Top "P3V6_L01_P154" (solid, remove dead copper, pour order 154): 164.161,60.992 165.15,61.982 166.194,61.982 166.391,61.785 166.368,61.762 166.368,59.557 165.13,58.318 161.587,58.318 160.904,59.002 160.904,60.525 161.371,60.992 161.413,60.992
P3V6 on Top "P3V6_L01_P153" (solid, remove dead copper, pour order 153): 158.504,38.558 158.825,38.237 162.961,38.237 164.006,37.199 165.898,37.199 166.082,37.015 166.082,35.84 167.022,35.84 167.022,37.725 165.993,38.754 165.993,48.732 167.898,50.637 167.898,55.437 167.911,55.451 164.73,55.451 163.681,54.401 163.681,44.459 163.28,44.059 162.35,44.059 158.504,40.212 158.504,39.55
P12V0 on Top "P12V0_L01_P145" (solid, remove dead copper, pour order 145): 161.428,8.138 160.809,8.138 159.922,9.025 159.922,10.372 160.55,11.001 163.191,11.001 163.799,10.392 163.799,9.04 162.898,8.138
P12V0_CPCIS on Top "P12V0_CPCIS_L01_P144" (solid, remove dead copper, pour order 144): 161.428,7.395 160.809,7.395 159.922,6.508 159.922,4.479 160.314,4.086 165.523,4.086 165.735,4.298 165.735,5.478 165.4,5.813 165.4,7.11 165.115,7.395
P5V5 on Top "P5V5_L01_P139" (solid, remove dead copper, pour order 139): 141.569,86.486 141.569,85.508 141.313,85.252 141.313,81.639 157.989,64.964 164.03,64.964 164.839,64.155 166.101,64.155 166.515,64.569 166.515,65.785 165.25,67.05 159.196,67.05 142.754,83.492 142.754,85.311 142.565,85.499 142.565,86.12 142.4,86.286
GND on Top "GND_L01_P138" (solid, remove dead copper, pour order 138): 162.015,64.331 162.015,61.629 164.206,61.629 164.629,62.053 170.369,62.053 172.318,60.104 172.318,59.19 173.189,58.318 175.941,58.318 176.318,58.696 176.318,60.152 175.867,60.603 173.366,60.603 172.449,61.521 172.449,64.755 172.003,65.201 171.259,65.201 169.991,63.933 164.58,63.933 164.182,64.331
P13V0 on Top "P13V0_L01_P137" (solid, remove dead copper, pour order 137): 143.068,86.486 143.068,83.946 155.732,71.282 157.681,71.282 157.681,76.8 157.682,76.801 152.762,76.801 145,84.563 145,85.952 144.464,86.488 143.943,86.488
P12V0 on Top "P12V0_L01_P135" (solid, remove dead copper, pour order 135): 176.52,86.9 167.428,86.9 166.301,88.027 157.963,88.027 156.89,86.954 156.89,83.227 158.617,81.5 174.743,81.5 176.243,83 176.243,84.598
NetL17_1 on Top "NETL17_1_L01_P134" (solid, remove dead copper, pour order 134): 141.313,87.193 141.313,88.46 141.826,88.973 141.826,93.283 143.756,93.283 144.318,92.721 144.318,87.193
NetL17_2 on Top "NETL17_2_L01_P133" (solid, remove dead copper, pour order 133): 139.638,87.623 139.638,88.942 139.186,89.394 139.186,92.998 139.471,93.283 141.4,93.283 141.4,89.057 140.886,88.544 140.886,87.312 140.649,87.074 140.624,87.099 139.902,87.099
P5V5A on Top "P5V5A_L01_P131" (solid, remove dead copper, pour order 131): 136.498,89.974 136.498,88.979 137.176,88.301 137.176,84.234 138.121,83.289 139.942,83.289 140.884,84.232 140.884,86.602 139.263,86.602 139.263,88.789 138.077,89.975 136.654,89.975
P5V5A on Top "P5V5A_L01_P128" (solid, remove dead copper, pour order 128): 126.427,89.974 126.427,88.979 127.105,88.301 127.105,84.984 127.373,84.717 129.722,84.717 130.293,85.288 130.293,88.991 129.585,89.699 128.282,89.699 128.006,89.975 126.583,89.975
GND on Top "GND_L01_P126" (solid, remove dead copper, pour order 126): 124.437,91.559 124.437,88.923 123.918,88.405 123.918,84.807 124.011,84.714 124.014,84.717 126.6,84.717 126.683,84.801 126.683,88.392 126.171,88.905 126.171,91.516 126.145,91.542
STRIP1 on Top "esd1" (solid, pour order 105): 217.519,0.962 217.536,0.962 218.776,2.202 119.986,2.202 119.986,0.962
GND on Top "GND_L01_P110" (solid, remove dead copper, pour order 110): 202,53.575 202,46.775 219.775,46.775 219.775,53.575
STRIP2 on Top "STRIP2_L01_P106" (solid, pour order 106): 82.919,0.962 99.986,0.962 99.986,2.242 44.986,2.242 44.986,0.962
CHASSIS on Top "esd1" (solid, pour order 104): 0.236,2.242 39.986,2.242 39.986,1.012 0.236,1.012
no net on L3 "Balancing_L3" (solid, pour order 185): -2.539,10.815 cw(c-2.489,10.82) -2.54,10.82 -2.54,15.138 cw(c-2.489,15.138) -2.539,15.142 cw(c-2.489,15.145) -2.54,15.145 -2.54,22.645 -2.54,89.511 cw(c-2.489,89.511) -2.525,89.547 -0.05,92.021 -0.05,100 cw(c0,100) 0,100.05 159.99,100.05 cw(c159.995,100.001) 159.995,100.05 218.037,100.05 cw(c218.039,100) 218.075,100.036 220.074,98.036 cw(c220.039,98) 220.089,98 220.089,2 cw(c220.039,2) 220.074,1.964 218.075,-0.035 cw(c218.039,0) 218.039,-0.05 0,-0.05 cw(c0,0) -0.05,0 -0.05,8.299 -2.525,10.773 cw(c-2.489,10.809)
GND on L3 "GND_L03_P176" (solid, remove dead copper, pour order 176): -2.525,2.5 191.75,2.5 220.074,2.5 220.074,95.733 -2.525,95.733
P10V5A on L3 "P10V5A_L03_P111" (solid, remove dead copper, pour order 111): 104.546,59.324 106.088,59.324 106.09,59.326 106.402,59.013 106.402,58.458 106.011,58.067 106.011,50.978 105.63,50.597 104.771,50.597 104.318,51.05 104.318,59.095
Vs on L3 "VS_L03_P175" (solid, remove dead copper, pour order 175): 20.267,53.931 16.972,57.226 16.972,75.484 17.13,75.642 17.399,75.642 17.575,75.467 17.575,58.299 18.329,57.545 21.054,57.545 21.517,58.008 21.517,75.144 22.412,76.04 31.146,76.04 32.019,76.912 32.676,76.912 34.697,74.891 34.697,70.167 27.903,63.373 27.903,56.934 23.073,56.934 22.5,56.362 22.5,53.931
P3V3A on L3 "P3V3A_L03_P174" (solid, remove dead copper, pour order 174): 22.858,56.123 22.858,53.931 26.819,53.931 27.25,53.5 27.25,44.5 32.154,39.596 32.154,33.795 32.489,33.46 44.246,33.46 45.563,34.777 45.563,37.195 44.462,38.297 37.777,38.297 29.412,46.661 29.412,54.852 27.903,56.362 23.097,56.362
NetC40_2 on L3 "NONET_L-01_P-001" (solid, remove dead copper, pour order 173): 71.264,85.594 61.948,76.278 61.948,66.802 77.872,50.878 79.878,50.878 80.16,51.16 80.16,54.129 79.873,54.416 78.334,54.416 65.4,67.35 65.4,75.15 73.167,82.917 95.857,82.917 96.475,83.535 96.475,84.955 95.837,85.594
NetC19_2 on L3 "NETC19_2_L03_P159" (solid, remove dead copper, pour order 159): 166.193,66.75 165.74,66.296 165.74,59.67 166.193,59.216 174.93,59.216 176.382,60.667 176.382,64.446 174.078,66.75 167.962,66.75
P12V0_CPCIS on L3 "L3-P12V0_CPCIS" (solid, pour order 132): 200.794,3.608 200.794,2.055 219.05,2.055 219.03,5.847 202.286,5.847 201.884,6.25 160.368,6.25 159.922,5.804 159.922,3.781 200.621,3.781
P5V5A on L3 "P5V5A_L03_P156" (solid, remove dead copper, pour order 156): 128.585,84.656 130.827,82.414 139.108,82.414 140.413,83.719 140.413,85.688 138.406,87.696 128.919,87.696 128.585,87.361
GND on L2 "GND_L02_P165" (solid, remove dead copper, pour order 165): -2.525,2.5 191.75,2.5 220.074,2.5 220.074,95.733 -2.525,95.733
no net on L2 "Balancing_L2" (solid, pour order 184): -2.539,10.815 cw(c-2.489,10.82) -2.54,10.82 -2.54,15.138 cw(c-2.489,15.138) -2.539,15.142 cw(c-2.489,15.145) -2.54,15.145 -2.54,22.645 -2.54,89.511 cw(c-2.489,89.511) -2.525,89.547 -0.05,92.021 -0.05,100 cw(c0,100) 0,100.05 159.99,100.05 cw(c159.995,100.001) 159.995,100.05 218.037,100.05 cw(c218.039,100) 218.075,100.036 220.074,98.036 cw(c220.039,98) 220.089,98 220.089,2 cw(c220.039,2) 220.074,1.964 218.075,-0.035 cw(c218.039,0) 218.039,-0.05 0,-0.05 cw(c0,0) -0.05,0 -0.05,8.299 -2.525,10.773 cw(c-2.489,10.809)
RF_GND_OUT0 on L2 "RF_GND_OUT0_L02_P164" (solid, remove dead copper, pour order 164): -2.489,18.156 15.655,18.156 cw(c15.655,17.315) 16.25,17.91 cw(c15.707,17.367) 16.475,17.367 16.475,10.505 cw(c15.63,10.505) 15.63,9.66 -2.488,9.66
RF_GND_OUT1 on L2 "RF_GND_OUT1_L02_P163" (solid, remove dead copper, pour order 163): -2.489,27.603 15.655,27.603 cw(c15.655,26.762) 16.25,27.357 cw(c15.707,26.814) 16.475,26.813 16.475,19.952 cw(c15.63,19.952) 15.63,19.107 -2.488,19.107
RF_GND_OUT2 on L2 "RF_GND_OUT2_L02_P162" (solid, remove dead copper, pour order 162): -2.489,37.05 15.655,37.05 cw(c15.655,36.209) 16.25,36.803 cw(c15.707,36.26) 16.475,36.26 16.475,29.398 cw(c15.63,29.398) 15.63,28.553 -2.488,28.553
RF_GND_OUT3 on L2 "RF_GND_OUT3_L02_P161" (solid, remove dead copper, pour order 161): -2.489,46.496 15.655,46.496 cw(c15.655,45.655) 16.25,46.25 cw(c15.707,45.707) 16.475,45.707 16.475,38.845 cw(c15.63,38.845) 15.63,38 -2.488,38
RF_DIV5_GND on L2 "RF_DIV5_GND_L02_P112" (solid, remove dead copper, pour order 112): 30.162,60.8 cw(c30.825,60.8) 30.825,61.463 34.078,61.463 cw(c34.078,60.74) 34.801,60.74 34.801,55.764 cw(c33.721,55.764) 33.721,54.684 31.163,54.684 cw(c31.163,55.685) 30.162,55.685

## Keep-outs
Top:
  lines w0.254: 0.453,8.689 4.9,8.689 6.35,7.239 6.35,6.475 ; 6.325,92.075 6.325,93.523 ; 6.325,95.174 6.325,96.597 6.782,97.053 139.743,97.053 ; 6.35,4.7 6.35,3.251 6.826,2.775 19.937,2.746 53.797,2.746 ; 53.523,2.721 56.137,2.721 161.775,2.717 219.775,2.717 ; 160.45,97.053 219.35,97.053 ; 169.743,97.053 189.453,97.053
Bot:
  lines w0.152: 6.888,2.713 37.213,2.713 ; 51.5,2.713 68.788,2.713
  lines w0.254: 0.356,8.712 4.801,8.712 6.35,7.163 6.35,6.475 ; 6.325,92.075 6.325,96.573 6.805,97.053 159.45,97.053 ; 6.35,7.214 6.35,6.475 ; 6.888,2.713 6.553,3.048 6.35,3.251 6.35,4.7 6.35,4.775 6.629,5.055 6.629,6.196 6.35,6.475 ; 68.788,2.713 148.865,2.713 ; 148.865,2.718 219.242,2.713 ; 160.375,97.053 219.4,97.053 ; 178.865,2.713 189.563,2.713

## Other copper
Top:
  region net Vs: 30.361,69.327 30.361,68.912 30.981,68.912 30.981,69.327
  rectangle net CHASSIS: 1.061,1.65 6.05,5.528
L3:
  pour cut-out: 37.5,85.75 37.5,84.631 38.4,84.631 38.4,85.751 37.511,85.751
  pour cut-out: -2.489,46.114 16.417,46.001 16.417,76.171 19.377,79.132 25.848,79.132 28.4,81.684 28.4,95.6 -1.571,95.6 -2.544,96.573
  pour cut-out: -2.489,46.496 16.045,46.496 16.478,46.063 16.478,10.228 15.913,9.663 -1.344,9.663 -2.488,10.808
Bot:
  region net Vs: 30.361,69.336 30.361,68.92 30.981,68.92 30.981,69.336

## Silkscreen, mask and mechanical layers (free items; w line width, h text height)
TopOverlay:
  drawing of 1004 lines, arcs and shapes, not listed
  text "GND" at 146.328,89.389 h0.8
  text "VCC / OSC" at 104.091,89.187 h0.8
  text "P12V0" at 145.692,80.544 h0.8
  text "P5V4A" at 145.739,64.678 h0.8
  text "EEM" at 182.25,61.7 h1.52
  text "P10V5A" at 145.303,35.723 h0.8
  text "P3V3" at 146.05,27.9 h0.8
  text "SCL" at 162.859,22.886 h1
  text "SDA" at 162.823,20.403 h1
  text "P3V3_MP" at 158.873,18.005 h1
  text "WENZEL REF v1.0" at 54.272,17.19 h1.5
  text "WUT ISE 2023" at 58.581,14.243 h1.02
  text "P3V3 / CPCIS" at 145.897,10.326 h0.8
  text "GND" at 146.558,4.459 h0.8
BottomOverlay:
  drawing of 421 lines, arcs and shapes, not listed
  text "WENZEL REF v1.0" at 65.395,17.222 h1.5
  text "WUT ISE 2023" at 60.614,14.243 h1.02
TopSolder:
  rectangle: 119.981,0.958 160.778,2.241
  rectangle: 160.514,0.94 218.8,2.2
  rectangle: 44.983,0.955 99.987,2.251
  rectangle: 0.2,1 40,2.3
  region: 206.037,51.755 206.037,48.255 220,48.255 220,51.755
BottomSolder:
  rectangle: 119.994,0.964 159.505,2.247
  rectangle: 0.212,1.005 40.012,2.305
  rectangle: 44.995,0.96 99.999,2.256
  rectangle: 159.047,0.964 218.812,2.224
  region: 206.037,51.755 206.037,48.255 220,48.255 220,51.755
Mechanical1:
  lines w0.1: -2.489,10.809 0,8.32 0,0 159.995,0 218.039,0 220.039,2 220.039,98 218.039,100 159.995,100 0,100 0,92 ; -2.489,10.82 -2.489,15.138 ; -2.489,15.145 -2.489,22.645 ; -2.489,89.511 -2.489,22.645 ; -2.489,22.645 -2.489,22.645
Mechanical4:
  lines w0.1: -2.6,-14.238 -2.6,117.232
  lines w0.15: -5.044,-14.194 -5.044,114.162
  lines w0.3: 0.482,44 1.75,44 ; 0.482,61 1.75,61 ; 0.914,79.4 1.014,79.5 2.5,79.5 ; 1.232,28.95 2.5,28.95 ; 1.232,35.5 2.5,35.5 ; 1.232,52.5 2.5,52.5 ; 1.232,69.5 2.5,69.5 ; 1.232,76.5 2.5,76.5 3.759,76.5 ; 1.232,86.5 2.5,86.5 ; 1.739,45.562 1.75,45.551 1.75,44 ; 1.739,62.562 1.75,62.551 1.75,61 ; 1.75,42.652 1.75,44 ; 1.75,59.652 1.75,61 ; 2.288,5.512 3.556,5.512 ; 2.464,74.854 2.5,74.89 2.5,79.5 ; 2.489,30.512 2.5,30.501 2.5,28.95 ; 2.489,37.062 2.5,37.051 2.5,35.5 ; 2.489,54.062 2.5,54.051 2.5,52.5 ; 2.489,71.062 2.5,71.051 2.5,69.5 ; 2.489,88.062 2.5,88.051 2.5,86.5 ; 2.5,27.602 2.5,28.95 ; 2.5,34.152 2.5,35.5 ; 2.5,51.152 2.5,52.5 ; 2.5,68.152 2.5,69.5 ; 2.5,81.712 2.5,79.5 ; 2.5,85.152 2.5,86.5 ; 3.545,7.074 3.556,7.063 3.556,5.512 ; 3.556,4.163 3.556,5.512 ; 3.606,44 1.75,44 ; 3.606,61 1.75,61 ; 3.759,79.5 2.5,79.5 ; 4.356,28.95 2.5,28.95 ; 4.356,35.5 2.5,35.5 ; 4.356,52.5 2.5,52.5 ; 4.356,69.5 2.5,69.5 ; 4.356,86.5 2.5,86.5 ; 5.412,5.512 3.556,5.512
DrillDrawing:
  drawing of 295 lines, arcs and shapes, not listed
  text "Layer" at 22.606,150.342 h1.52
  text "Name" at 33.018,150.342 h1.52
  text "Material" at 55.11,150.342 h1.52
  text "Thickness" at 76.948,150.342 h1.52
  text "Constant" at 93.454,150.342 h1.52
  text "Board Layer Stack" at 107.928,150.342 h1.52
  text "TopOverlay" at 33.018,147.294 h1.52
  text "TopSolder" at 33.018,144.246 h1.52
  text "Solder Resist" at 55.11,144.246 h1.52
  text "0.010mm" at 76.948,144.246 h1.52
  text "3.5" at 93.454,144.246 h1.52
  text "1" at 22.606,141.198 h1.52
  text "Top" at 33.018,141.198 h1.52
  text "0.035mm" at 76.948,141.198 h1.52
  text "Dielectric1" at 33.018,138.15 h1.52
  text "FR-4" at 55.11,138.15 h1.52
  text "0.180mm" at 76.948,138.15 h1.52
  text "4.2" at 93.454,138.15 h1.52
  text "2" at 22.606,135.102 h1.52
  text "L2" at 33.018,135.102 h1.52
  text "0.035mm" at 76.948,135.102 h1.52
  text "Dielectric 3" at 33.018,132.054 h1.52
  text "FR-4" at 55.11,132.054 h1.52
  text "1.100mm" at 76.948,132.054 h1.52
  text "4.2" at 93.454,132.054 h1.52
  text "3" at 22.606,129.006 h1.52
  text "L3" at 33.018,129.006 h1.52
  text "0.035mm" at 76.948,129.006 h1.52
  text "Dielectric2" at 33.018,125.958 h1.52
  text "FR-4" at 55.11,125.958 h1.52
  text "0.180mm" at 76.948,125.958 h1.52
  text "4.2" at 93.454,125.958 h1.52
  text "4" at 22.606,122.91 h1.52
  text "Bot" at 33.018,122.91 h1.52
  text "0.035mm" at 76.948,122.91 h1.52
  text "BottomSolder" at 33.018,119.862 h1.52
  text "Solder Resist" at 55.11,119.862 h1.52
  text "0.010mm" at 76.948,119.862 h1.52
  text "3.5" at 93.454,119.862 h1.52
  text "BottomOverlay" at 33.018,116.814 h1.52

## Text inside footprints (layer, text, board x,y; h text height)
IC36: Mechanical14 "5" at 171.01,66.547 h0.4; Mechanical14 "4" at 169.74,66.547 h0.4; Mechanical14 "3" at 168.47,66.547 h0.4; Mechanical14 "2" at 167.2,66.547 h0.4; Mechanical14 "1" at 165.93,66.547 h0.4; Mechanical14 "A" at 164.787,65.396 h0.4; Mechanical14 "B" at 164.787,64.126 h0.4; Mechanical14 "C" at 164.787,62.856 h0.4; Mechanical14 "D" at 164.787,61.586 h0.4; Mechanical14 "E" at 164.787,60.316 h0.4
J2: TopOverlay "30" at 187.051,20.873 h1.02 r270; Mechanical14 "30" at 187.051,20.873 h1.02 r270
J6: TopOverlay "1" at 198.239,4.15 h1 r90; TopOverlay "L" at 203.064,16.025 h1 r90; TopOverlay "2" at 198.239,6.15 h0.95 r90; TopOverlay "K" at 204.464,16.025 h1 r90; TopOverlay "J" at 205.864,16.025 h1 r90; TopOverlay "I" at 207.264,16.275 h1 r90; TopOverlay "H" at 208.664,16.025 h1 r90; TopOverlay "G" at 210.064,16.025 h1 r90; TopOverlay "F" at 211.464,16.025 h1 r90; TopOverlay "3" at 198.25,8.175 h1 r90; TopOverlay "4" at 198.2,10.175 h1 r90; TopOverlay "5" at 198.225,12.125 h1 r90; TopOverlay "6" at 198.225,14.075 h1 r90; TopOverlay "E" at 212.864,16.025 h1 r90; TopOverlay "D" at 214.264,16.025 h1 r90; TopOverlay "C" at 215.664,16.95 h1 r90; TopOverlay "B" at 217.064,16.95 h1 r90; TopOverlay "A" at 218.464,16.95 h1 r90; Mechanical14 "L" at 203.039,2.3 h1 r90; Mechanical14 "2" at 197.989,6.15 h1 r90; Mechanical14 "1" at 197.989,4.15 h1 r90; Mechanical14 "K" at 204.439,2.3 h1 r90; Mechanical14 "J" at 205.839,2.3 h1 r90; Mechanical14 "I" at 207.239,2.55 h1 r90; Mechanical14 "H" at 208.639,2.3 h1 r90; Mechanical14 "G" at 210.039,2.3 h1 r90; Mechanical14 "F" at 211.439,2.3 h1 r90; Mechanical14 "3" at 197.989,8.15 h1 r90; Mechanical14 "4" at 197.989,10.15 h1 r90; Mechanical14 "5" at 197.989,12.15 h1 r90; Mechanical14 "6" at 197.989,14.15 h1 r90; Mechanical14 "E" at 212.839,2.3 h1 r90; Mechanical14 "D" at 214.239,2.3 h1 r90; Mechanical14 "C" at 215.639,1.3 h1 r90; Mechanical14 "B" at 217.039,1.3 h1 r90; Mechanical14 "A" at 218.439,1.3 h1 r90; Mechanical8 "Edge of Daugher Card" at 220.789,6.275 h0.5 r90; Mechanical8 "Top Surface of Mother Board" at 232.289,5.125 h0.5 r90
OSC1: TopOverlay "4" at 80.1,76.9 h1.2 r90; TopOverlay "1" at 61.05,54.05 h1.2 r90; TopOverlay "2" at 70.575,53.85 h1.2 r90; TopOverlay "3" at 80.1,53.85 h1.2 r90; TopOverlay "5" at 61.05,76.9 h1.2 r90; Mechanical14 "4" at 80.1,76.9 h1.2 r90; Mechanical14 "1" at 61.05,54.05 h1.2 r90; Mechanical14 "2" at 70.575,53.85 h1.2 r90; Mechanical14 "3" at 80.1,53.85 h1.2 r90; Mechanical14 "5" at 61.05,76.9 h1.2 r90